# EAGLE board v3m (EAGLE 6.3)
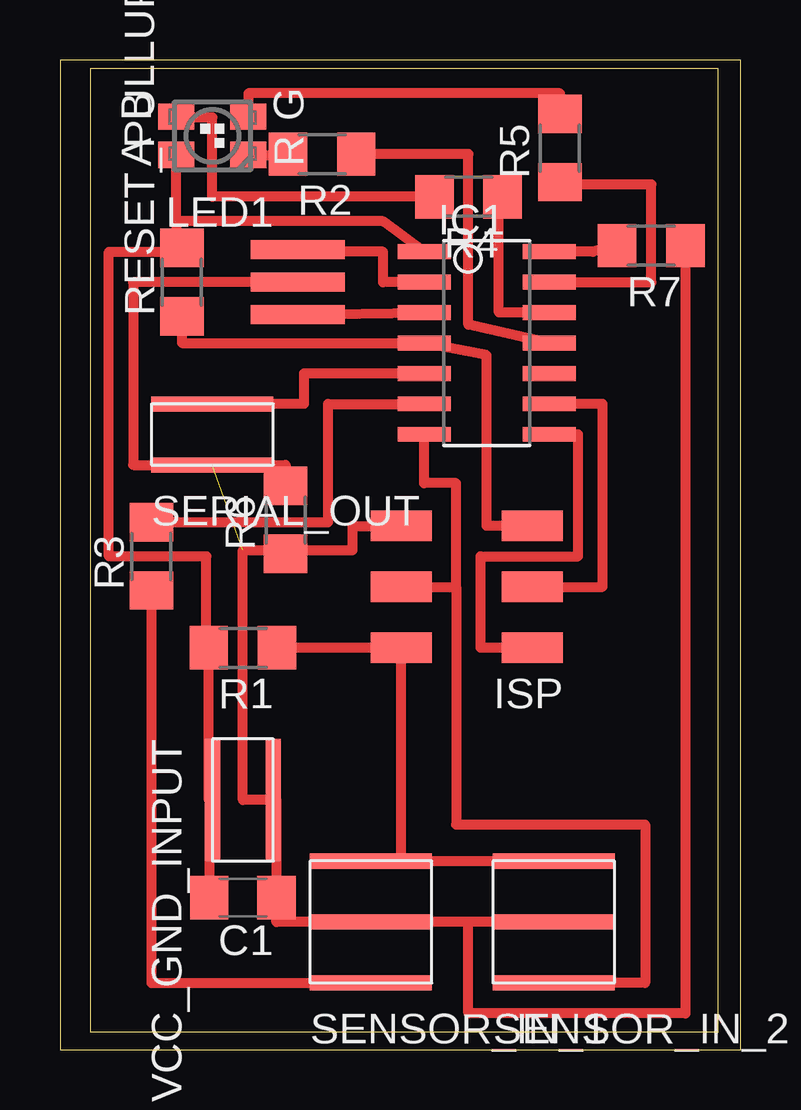
[diagram p0: board, top side]

Size 28.37 x 41.27 mm. Coordinates in mm from the lower left corner, seen from the top.
Outline: 0,0 28.37,0 28.37,41.27 0,41.27 0,0
Copper layers (1*16): Top 0.035mm / dielectric 1.5mm / Bottom 0.035mm
Design rules "default": minimum track width 10mil, minimum drill 24mil, track to track 8mil, track to pad 8mil, pad to pad 8mil, via to via 8mil, smd to smd 8mil, copper to edge 40mil, drill to drill 8mil, minimum pad ring 10mil, minimum via ring 8mil, stop-mask expansion 4mil, vias tented up to drill 0mil, thermal gap 10mil

## Footprints (pad centres in the part's own frame; a part is rotated, then mirrored left to right if it is on the bottom)
C1206 = smd 1.6 x 1.8: 1 -1.4,0; 2 1.4,0
SOIC14 = smd 0.61 x 2.21: 1 -3.81,-2.603; 2 -2.54,-2.603; 3 -1.27,-2.603; 4 0,-2.603; 5 1.27,-2.603; 6 2.54,-2.603; 7 3.81,-2.603; 8 3.81,2.603; 9 2.54,2.603; 10 1.27,2.603; 11 0,2.603; 12 -1.27,2.603; 13 -2.54,2.603; 14 -3.81,2.603
2X03SMD = smd 2.54 x 1.27: 1 -2.54,2.54; 2 2.92,2.54; 3 -2.54,0; 4 2.92,0; 5 -2.54,-2.54; 6 2.92,-2.54
P-LCC-4-3 = smd 1.1 x 1.5: A -0.8,1.5; B 0.8,1.5; G 0.8,-1.5; R -0.8,-1.5
R1206 = smd 1.6 x 1.803: 1 -1.422,0; 2 1.422,0
SMT_PINS_3 = smd 5.08 x 0.635: 1 0,0; 2 0,2.54; 3 0,5.08
SMT_PINS_2 = smd 5.08 x 0.635: 1 0,0; 2 0,2.54
EFOBM = smd 0.8 x 3.9: 1 -1.35,0; 2 0,0; 3 1.35,0

## Placement (x,y rotation side)
C1  1uF  [C1206]  7.62,6.35 180 top
IC1  ATTINY44-SSU  [SOIC14]  17.78,29.46 270 top
ISP  AVRISPSMD  [2X03SMD]  17.14,19.3 180 top
LED1  [P-LCC-4-3]  6.35,38.1 90 top
R1  0  [R1206]  7.62,16.76 180 top
R2  1k  [R1206]  10.92,37.34 180 top
R3  0 Ohm  [R1206]  3.81,20.57 90 top
R4  500  [R1206]  17.02,35.56 180 top
R5  1k  [R1206]  20.83,37.59 90 top
R6  0  [R1206]  9.4,22.1 90 top
R7  0  [R1206]  24.64,33.53 180 top
RESET_PULLUP  10k  [R1206]  5.08,32 90 top
SENSOR_IN_1  [SMT_PINS_3]  12.95,2.79 0 top
SENSOR_IN_2  [SMT_PINS_3]  20.57,2.79 0 top
SERIAL_OUT  2_PIN_HEADERHEADER  [SMT_PINS_2]  6.35,24.38 0 top
U$1  RESONATOR  [EFOBM]  9.91,32 270 top
VCC_GND_INPUT  2_PIN_HEADERHEADER  [SMT_PINS_2]  6.35,10.41 270 top

## Library data of the parts
C1 R3 RESET_PULLUP = resistor
IC1 ISP LED1 R1 R2 R4-R7 U$1 = fab
SENSOR_IN_1 SENSOR_IN_2 SERIAL_OUT VCC_GND_INPUT = ng

## Nets
ATTINY45: IC1.9 ISP.3
N$2: C1.2 IC1.1 LED1.A R1.2 RESET_PULLUP.2 VCC_GND_INPUT.1
N$4: IC1.8 ISP.1
N$5: IC1.4 ISP.5 RESET_PULLUP.1
N$6: IC1.5 SERIAL_OUT.2
N$7: IC1.2 U$1.1
N$8: ISP.2 R1.1 SENSOR_IN_1.3 SENSOR_IN_2.3
N$9: R3.1 SENSOR_IN_1.1
N$10: LED1.R R2.2
N$11: LED1.B R4.2
N$12: IC1.6 R3.2
N$13: IC1.3 U$1.3
N$14: LED1.G R5.2
N$15: IC1.13 R5.1
N$16: IC1.14 R7.2
N$17: IC1.11 R2.1
N$18: IC1.12 R4.1
N$19: R6.2 SERIAL_OUT.1
N$20: C1.1 ISP.6 R6.1 R7.1 SENSOR_IN_1.2 SENSOR_IN_2.2 U$1.2 VCC_GND_INPUT.2
N$21: IC1.7 ISP.4 SENSOR_IN_2.1

## Tracks (layer width: path | path; a pad name or v marks a point on that pad's centre or on a via)
ATTINY45
  Top 0.406: ISP.3 22.61,19.3 22.61,26.92 IC1.9
N$2
  Top 0.406: IC1.1 13.46,34.54 4.85,34.54 | VCC_GND_INPUT.1 6.22,10.41 | 6.22,10.41 6.2,10.41 R1.2 6.1,16.76 6.1,20.57 2.03,20.57 2.03,33.27 5.08,33.27 RESET_PULLUP.2 4.85,33.43 4.85,34.54 | 6.22,10.41 C1.2 | 4.85,34.54 LED1.A
N$4
  Top 0.406: ISP.1 17.53,16.76 17.53,20.57 21.59,20.57 21.59,25.65 IC1.8
N$5
  Top 0.406: ISP.5 17.78,21.84 17.78,28.96 IC1.4 5.08,29.46 RESET_PULLUP.1
N$6
  Top 0.406: IC1.5 10.16,28.19 10.16,26.92 SERIAL_OUT.2
N$7
  Top 0.406: IC1.2 13.46,32 13.46,33.27 9.91,33.27 U$1.1
N$8
  Top 0.406: SENSOR_IN_2.3 SENSOR_IN_1.3 14.23,7.87 ISP.2 R1.1
N$9
  Top 0.406: R3.1 3.81,2.79 SENSOR_IN_1.1
N$10
  Top 0.406: LED1.R 9.5,37.3 R2.2
N$11
  Top 0.406: R4.2 6.35,35.56 6.35,38.86 4.85,38.86 LED1.B
N$12
  Top 0.406: R3.2 11.18,22 11.18,26.92 IC1.6
N$13
  Top 0.406: U$1.3 IC1.3
N$14
  Top 0.406: R5.2 20.83,39.88 7.85,39.88 LED1.G
N$15
  Top 0.406: IC1.13 24.64,32 24.64,36.07 20.83,36.07 R5.1
N$16
  Top 0.406: R7.2 22.2,33.27 IC1.14
N$17
  Top 0.406: IC1.11 17.02,30.23 17.02,37.34 R2.1
N$18
  Top 0.406: IC1.12 18.29,30.73 18.29,35.05 18.8,35.05 R4.1
N$19
  Top 0.406: SERIAL_OUT.1 9.4,24.38 R6.2
N$20  (1 unrouted)
  Top 0.406: U$1.2 3.05,32 3.05,24.38 6.35,24.38 | SENSOR_IN_2.2 17.02,5.33 | 17.02,5.33 SENSOR_IN_1.2 9.02,5.33 C1.1 9.02,10.41 VCC_GND_INPUT.2 7.62,10.41 7.62,20.83 9.4,20.83 | 9.4,20.83 12.19,20.83 12.19,21.84 ISP.6 | R6.1 9.4,20.83 | R7.1 26.06,1.52 17.02,1.52 17.02,5.33
N$21
  Top 0.406: 16.51,19.3 16.51,9.4 24.38,9.4 24.38,2.79 SENSOR_IN_2.1 | ISP.4 16.51,19.3 | 16.51,19.3 16.51,23.62 15.18,23.62 IC1.7